# Altium PCB printer_tag_device1.PcbDoc
Units mil, origin at the board's own origin, x right, y up, seen from the top; angles counter-clockwise.
Board outline 6000 x 4000 mil, 2 copper layers (Top Layer, Bottom Layer); 258 components, 164 nets, 940 pads, 4 vias.
Unrouted connection lines stored in the file: 662.
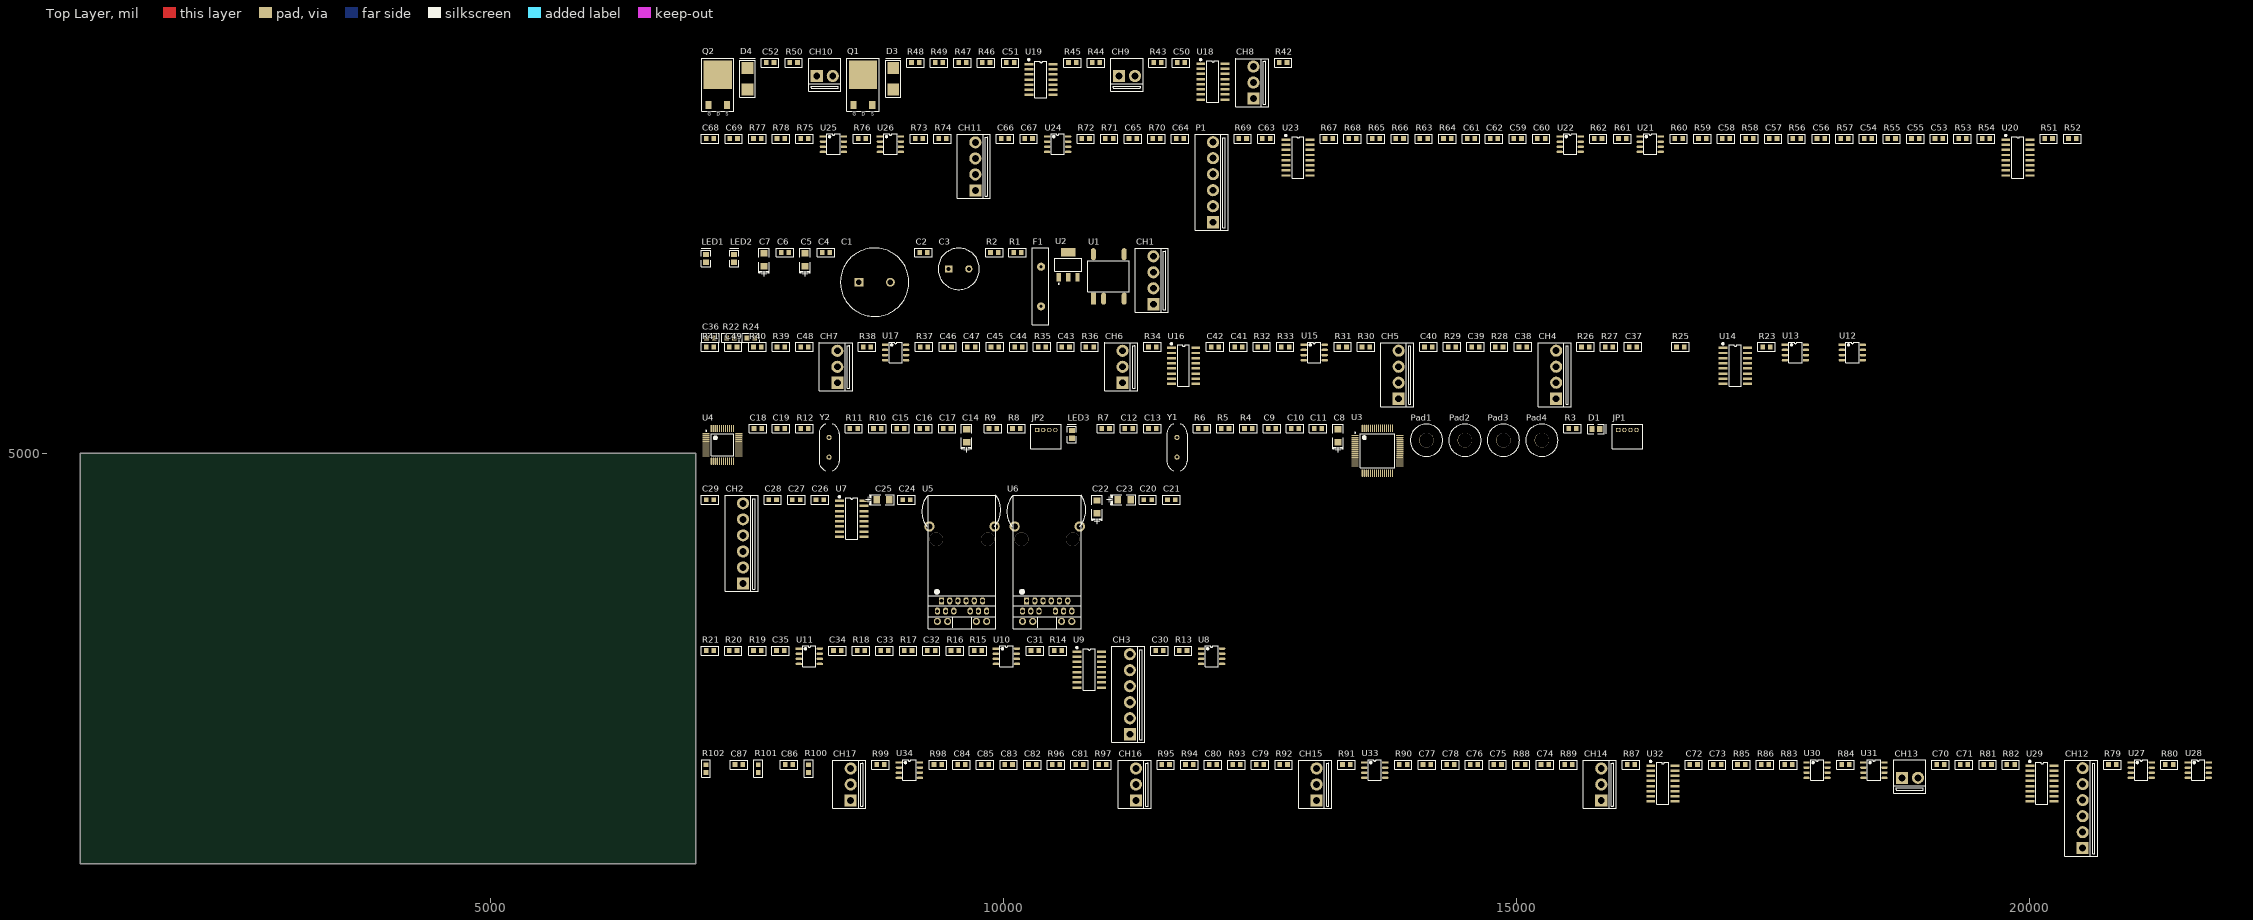
[diagram p0: Top Layer view]
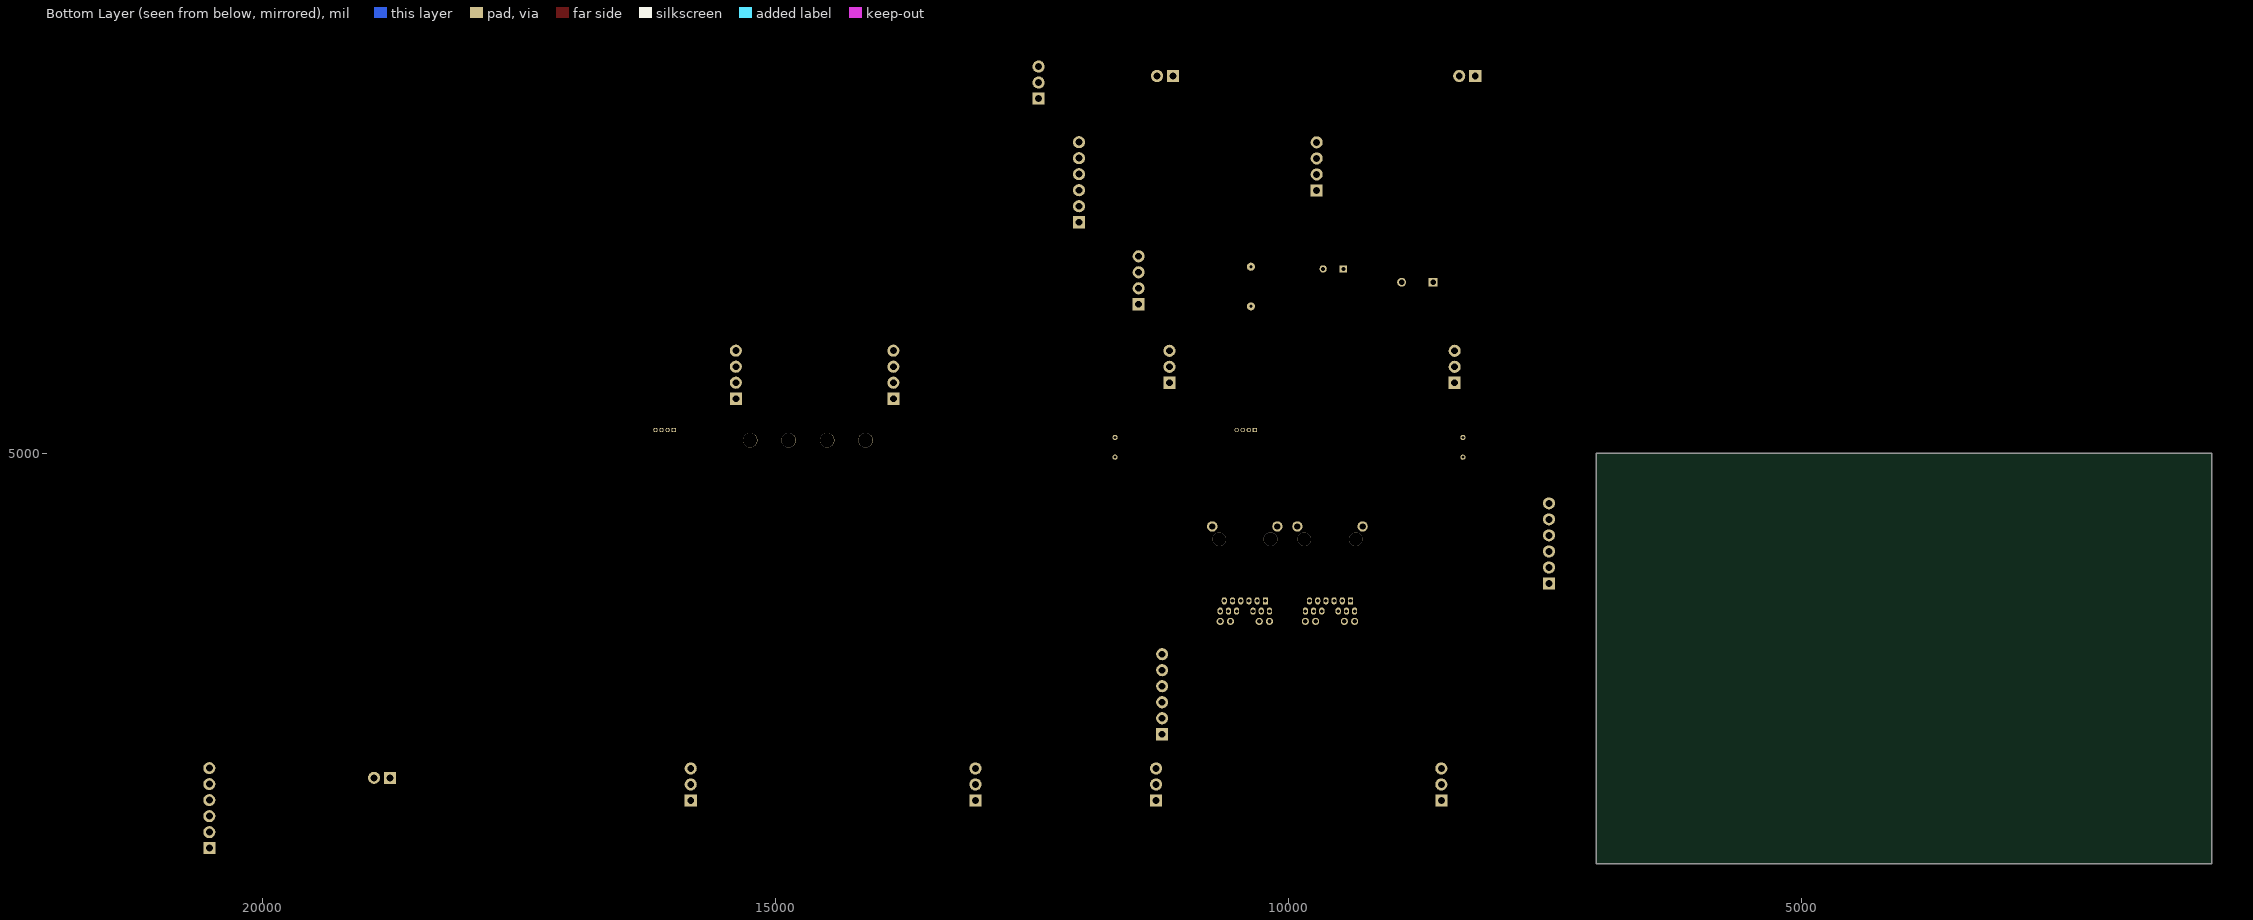
[diagram p1: Bottom Layer view, seen from below]

## Layer stack, top to bottom
Top Solder: solder mask 0.4, Solder Resist, Dk 3.5
Top Layer: signal copper 1.4
Dielectric 1: dielectric 12.6, FR-4, Dk 4.8
Bottom Layer: signal copper 1.4
Bottom Solder: solder mask 0.4, Solder Resist, Dk 3.5

## Board outline
1000,1000 7000,1000 7000,5000 1000,5000

## Design rules (kind name [scope] priority, off if disabled: settings)
Clearance [All] p1: gap=10
PolygonConnect [All] p1: connectstyle=Relief reliefconductorwidth=10 reliefentries=4 polygonreliefangle="90 Angle" airgapwidth=10
RoomDefinition roll_motorl_control [InComponentClass('roll_motorl_control')] p1: confinementstyle=ConfineIn formatcopy=TRUE lockcomponents=FALSE outline 7045,8270 12825,8270 12825,8960 7045,8960
RoomDefinition printer_control [InComponentClass('printer_control')] p2: confinementstyle=ConfineIn formatcopy=TRUE lockcomponents=FALSE outline 7045,7160 20515,7160 20515,8220 7045,8220
RoomDefinition power [InComponentClass('power')] p3: confinementstyle=ConfineIn formatcopy=TRUE lockcomponents=FALSE outline 7045,6240 11620,6240 11620,7110 7045,7110
RoomDefinition light_key_control [InComponentClass('light_key_control')] p4: confinementstyle=ConfineIn formatcopy=TRUE lockcomponents=FALSE outline 7045,5440 18420,5440 18420,6190 7045,6190
RoomDefinition cpu [InComponentClass('cpu')] p5: confinementstyle=ConfineIn formatcopy=TRUE lockcomponents=FALSE outline 7045,4750 16240,4750 16240,5395 7045,5395
RoomDefinition communition [InComponentClass('communition')] p6: confinementstyle=ConfineIn formatcopy=TRUE lockcomponents=FALSE outline 7045,3280 11730,3280 11730,4700 7045,4700
RoomDefinition belt_motor_control [InComponentClass('belt_motor_control')] p7: confinementstyle=ConfineIn formatcopy=TRUE lockcomponents=FALSE outline 7045,2170 12175,2170 12175,3230 7045,3230
RoomDefinition air_cylinder_control [InComponentClass('air_cylinder_control')] p8: confinementstyle=ConfineIn formatcopy=TRUE lockcomponents=FALSE outline 7045,1060 21790,1060 21790,2120 7045,2120
RoutingVias [All] p1: holewidth=28 width=50 viastyle="Through Hole" minholewidth=28 minwidth=50 maxholewidth=28 maxwidth=50
SolderMaskExpansion [All] p1: expansion=4
Width [All] p1: maxlimit=10 minlimit=10 preferedwidth=10
29 further rules are at their usual default settings.

## Classes and differential pairs
component class air_cylinder_control: C70 C71 C72 C73 C74 C75 C76 C77 C78 C79 C80 C81 C82 C83 C84 C85 C86 C87 CH12 CH13 CH14 CH15 CH16 CH17 R79 R80 R81 R82 R83 R84 R85 R86 R87 R88 R89 R90 R91 R92 R93 R94 R95 R96 R97 R98 R99 R100 R101 R102 U27 U28 U29 U30 U31 U32 U33 U34
component class belt_motor_control: C30 C31 C32 C33 C34 C35 CH3 R13 R14 R15 R16 R17 R18 R19 R20 R21 U8 U9 U10 U11
component class communition: C20 C21 C22 C23 C24 C25 C26 C27 C28 C29 CH2 U5 U6 U7
component class cpu: C8 C9 C10 C11 C12 C13 C14 C15 C16 C17 C18 C19 D1 JP1 JP2 LED3 Pad1 Pad2 Pad3 Pad4 R3 R4 R5 R6 R7 R8 R9 R10 R11 R12 U3 U4 Y1 Y2
component class light_key_control: C37 C38 C39 C40 C41 C42 C43 C44 C45 C46 C47 C48 C49 CH4 CH5 CH6 CH7 R23 R25 R26 R27 R28 R29 R30 R31 R32 R33 R34 R35 R36 R37 R38 R39 R40 R41 U12 U13 U14 U15 U16 U17
component class power: C1 C2 C3 C4 C5 C6 C7 CH1 F1 LED1 LED2 R1 R2 U1 U2
component class printer_control: C53 C54 C55 C56 C57 C58 C59 C60 C61 C62 C63 C64 C65 C66 C67 C68 C69 CH11 P1 R51 R52 R53 R54 R55 R56 R57 R58 R59 R60 R61 R62 R63 R64 R65 R66 R67 R68 R69 R70 R71 R72 R73 R74 R75 R76 R77 R78 U20 U21 U22 U23 U24 U25 U26
component class roll_motorl_control: C50 C51 C52 CH8 CH9 CH10 D3 D4 Q1 Q2 R42 R43 R44 R45 R46 R47 R48 R49 R50 U18 U19

## Components (designator, comment, footprint, x,y, rotation, side; value= is the part's Value field where it differs from the comment)
C1 "C_2200uF" C7.8*17 8590,6665 r0 top
C2 "Cap" 0805 9220,6955 r0 top
C3 "C_2200uF" C5*10 9465,6795 r0 top
C4 "Cap" 0805 8270,6955 r0 top
C5 "Cap Pol3" "CAP A-3216" 8065,6885 r90 top
C6 "Cap" 0805 7870,6955 r0 top
C7 "Cap Pol3" "CAP A-3216" 7665,6885 r90 top
C8 "Cap Pol3" "CAP A-3216" 13260,5170 r90 top
C9 "Cap" 0805 12615,5240 r0 top
C10 "Cap" 0805 12840,5240 r0 top
C11 "Cap" 0805 13065,5240 r0 top
C12 "Cap" 0805 11220,5240 r0 top
C13 "Cap" 0805 11450,5240 r0 top
C14 "Cap Pol3" "CAP A-3216" 9640,5170 r90 top
C15 "Cap" 0805 8995,5240 r0 top
C16 "Cap" 0805 9220,5240 r0 top
C17 "Cap" 0805 9450,5240 r0 top
C18 "Cap" 0805 7605,5240 r0 top
C19 "Cap" 0805 7830,5240 r0 top
C20 "Cap" 0805 11405,4545 r0 top
C21 "Cap" 0805 11635,4545 r0 top
C22 "Cap Pol3" "CAP A-3216" 10910,4475 r90 top
C23 "Cap Pol3" "CAP A-3216" 11175,4545 r0 top
C24 "Cap" 0805 9055,4545 r0 top
C25 "Cap Pol3" "CAP A-3216" 8825,4545 r0 top
C26 "Cap" 0805 8210,4545 r0 top
C27 "Cap" 0805 7980,4545 r0 top
C28 "Cap" 0805 7750,4545 r0 top
C29 "Cap" 0805 7140,4545 r0 top
C30 "Cap" 0805 11520,3075 r0 top
C31 "Cap" 0805 10305,3075 r0 top
C32 "Cap" 0805 9295,3075 r0 top
C33 "Cap" 0805 8840,3075 r0 top
C34 "Cap" 0805 8380,3075 r0 top
C35 "Cap" 0805 7825,3075 r0 top
C36 "Cap" 0805 7142.94,6123.06 r0 top
C37 "Cap" 0805 16135,6035 r0 top
C38 "Cap" 0805 15060,6035 r0 top
C39 "Cap" 0805 14600,6035 r0 top
C40 "Cap" 0805 14140,6035 r0 top
C41 "Cap" 0805 12290,6035 r0 top
C42 "Cap" 0805 12060,6035 r0 top
C43 "Cap" 0805 10605,6035 r0 top
C44 "Cap" 0805 10145,6035 r0 top
C45 "Cap" 0805 9915,6035 r0 top
C46 "Cap" 0805 9455,6035 r0 top
C47 "Cap" 0805 9685,6035 r0 top
C48 "Cap" 0805 8060,6035 r0 top
C49 "Cap" 0805 7365,6035 r0 top
C50 "Cap" 0805 11730,8805 r0 top
C51 "Cap" 0805 10065,8805 r0 top
C52 "Cap" 0805 7725,8805 r0 top
C53 "Cap" 0805 19115,8065 r0 top
C54 "Cap" 0805 18425,8065 r0 top
C55 "Cap" 0805 18885,8065 r0 top
C56 "Cap" 0805 17965,8065 r0 top
C57 "Cap" 0805 17500,8065 r0 top
C58 "Cap" 0805 17040,8065 r0 top
C59 "Cap" 0805 15010,8065 r0 top
C60 "Cap" 0805 15240,8065 r0 top
C61 "Cap" 0805 14555,8065 r0 top
C62 "Cap" 0805 14780,8065 r0 top
C63 "Cap" 0805 12560,8065 r0 top
C64 "Cap" 0805 11720,8065 r0 top
C65 "Cap" 0805 11260,8065 r0 top
C66 "Cap" 0805 10015,8065 r0 top
C67 "Cap" 0805 10245,8065 r0 top
C68 "Cap" 0805 7140,8065 r0 top
C69 "Cap" 0805 7370,8065 r0 top
C70 "Cap" 0805 19130,1965 r0 top
C71 "Cap" 0805 19360,1965 r0 top
C72 "Cap" 0805 16725,1965 r0 top
C73 "Cap" 0805 16955,1965 r0 top
C74 "Cap" 0805 15275,1965 r0 top
C75 "Cap" 0805 14815,1965 r0 top
C76 "Cap" 0805 14585,1965 r0 top
C77 "Cap" 0805 14125,1965 r0 top
C78 "Cap" 0805 14355,1965 r0 top
C79 "Cap" 0805 12500,1965 r0 top
C80 "Cap" 0805 12040,1965 r0 top
C81 "Cap" 0805 10740,1965 r0 top
C82 "Cap" 0805 10280,1965 r0 top
C83 "Cap" 0805 10050,1965 r0 top
C84 "Cap" 0805 9590,1965 r0 top
C85 "Cap" 0805 9820,1965 r0 top
C86 "Cap" 0805 7910,1965 r0 top
C87 "Cap" 0805 7420,1965 r0 top
CH1 "HEADER1X4" CH3.96-4PIN 11460,6450 r90 top
CH2 "HEADER1X6" CH3.96-6PIN 7460,3730 r90 top
CH3 "HEADER1X6" CH3.96-6PIN 11230,2260 r90 top
CH4 "HEADER1X4" CH3.96-4PIN 15385,5530 r90 top
CH5 "HEADER1X4" CH3.96-4PIN 13850,5530 r90 top
CH6 "HEADER1X3" CH3.96-3PIN 11160,5685 r90 top
CH7 "HEADER1X3" CH3.96-3PIN 8380,5685 r90 top
CH8 "HEADER1X3" CH3.96-3PIN 12435,8455 r90 top
CH9 "HEADER1X2" CH3.96-2PIN 11125,8675 r0 top
CH10 "HEADER1X2" CH3.96-2PIN 8180,8675 r0 top
CH11 "HEADER1X4" CH3.96-4PIN 9725,7560 r90 top
CH12 "HEADER1X6" CH3.96-6PIN 20515,1150 r90 top
CH13 "HEADER1X2" CH3.96-2PIN 18755,1835 r0 top
CH14 "HEADER1X3" CH3.96-3PIN 15825,1615 r90 top
CH15 "HEADER1X3" CH3.96-3PIN 13050,1615 r90 top
CH16 "HEADER1X3" CH3.96-3PIN 11290,1615 r90 top
CH17 "HEADER1X3" CH3.96-3PIN 8510,1615 r90 top
D1 "Ready" LED-0805 15735,5235 r0 top
D3 "1N5822(SS34)" SMA 8925,8545 r90 top (schematic designator D2)
D4 "1N5822(SS34)" SMA 7505,8545 r90 top (schematic designator D3)
F1 "X30_UF500" X30UF600 10365,6430 r90 top
JP1 "4 HEADER" CON4_1.5 16080,5225 r0 top
JP2 "4 HEADER" CON4_1.5 10415,5225 r0 top
LED1 "" LED-0805 7100,6860 r90 top
LED2 "" LED-0805 7375,6860 r90 top
LED3 "" LED-0805 10665,5145 r90 top
P1 "HEADER1X6" CH3.96-6PIN 12040,7250 r90 top
Pad1 "Pad" pad35 14120,5125 r0 top
Pad2 "Pad" pad35 14495,5125 r0 top
Pad3 "Pad" pad35 14870,5125 r0 top
Pad4 "Pad" pad35 15245,5125 r0 top
Q1 "FR5305 (PMOS-2)" TO-252 8630,8540 r0 top
Q2 "FR4105 (NMOS-2)" TO-252 7215,8540 r0 top
R1 "Res2" 0805 10135,6955 r0 top
R2 "Res2" 0805 9910,6955 r0 top
R3 "Res2" 0805 15545,5240 r0 top
R4 "Res2" 0805 12385,5240 r0 top
R5 "Res2" 0805 12160,5240 r0 top
R6 "Res2" 0805 11935,5240 r0 top
R7 "Res2" 0805 10995,5240 r0 top
R8 "Res2" 0805 10125,5240 r0 top
R9 "Res2" 0805 9895,5240 r0 top
R10 "Res2" 0805 8770,5240 r0 top
R11 "Res2" 0805 8540,5240 r0 top
R12 "Res2" 0805 8060,5240 r0 top
R13 "Res2" 0805 11750,3075 r0 top
R14 "Res2" 0805 10530,3075 r0 top
R15 "Res2" 0805 9750,3075 r0 top
R16 "Res2" 0805 9525,3075 r0 top
R17 "Res2" 0805 9070,3075 r0 top
R18 "Res2" 0805 8610,3075 r0 top
R19 "Res2" 0805 7600,3075 r0 top
R20 "Res2" 0805 7365,3075 r0 top
R21 "Res2" 0805 7140,3075 r0 top
R22 "Res2" 0805 7339.81,6123.06 r0 top
R23 "Res2" 0805 17435,6035 r0 top
R24 "Res2" 0805 7536.69,6123.06 r0 top
R25 "Res2" 0805 16595,6035 r0 top
R26 "Res2" 0805 15670,6035 r0 top
R27 "Res2" 0805 15900,6035 r0 top
R28 "Res2" 0805 14830,6035 r0 top
R29 "Res2" 0805 14370,6035 r0 top
R30 "Res2" 0805 13530,6035 r0 top
R31 "Res2" 0805 13305,6035 r0 top
R32 "Res2" 0805 12515,6035 r0 top
R33 "Res2" 0805 12745,6035 r0 top
R34 "Res2" 0805 11450,6035 r0 top
R35 "Res2" 0805 10375,6035 r0 top
R36 "Res2" 0805 10840,6035 r0 top
R37 "Res2" 0805 9225,6035 r0 top
R38 "Res2" 0805 8670,6035 r0 top
R39 "Res2" 0805 7830,6035 r0 top
R40 "Res2" 0805 7600,6035 r0 top
R41 "Res2" 0805 7140,6035 r0 top
R42 "Res2" 0805 12725,8805 r0 top
R43 "Res2" 0805 11500,8805 r0 top
R44 "Res2" 0805 10900,8805 r0 top
R45 "Res2" 0805 10670,8805 r0 top
R46 "Res2" 0805 9830,8805 r0 top
R47 "Res2" 0805 9600,8805 r0 top
R48 "Res2" 0805 9140,8805 r0 top
R49 "Res2" 0805 9370,8805 r0 top
R50 "Res2" 0805 7955,8805 r0 top
R51 "Res2" 0805 20185,8065 r0 top
R52 "Res2" 0805 20415,8065 r0 top
R53 "Res2" 0805 19345,8065 r0 top
R54 "Res2" 0805 19575,8065 r0 top
R55 "Res2" 0805 18655,8065 r0 top
R56 "Res2" 0805 17730,8065 r0 top
R57 "Res2" 0805 18195,8065 r0 top
R58 "Res2" 0805 17270,8065 r0 top
R59 "Res2" 0805 16810,8065 r0 top
R60 "Res2" 0805 16580,8065 r0 top
R61 "Res2" 0805 16030,8065 r0 top
R62 "Res2" 0805 15795,8065 r0 top
R63 "Res2" 0805 14095,8065 r0 top
R64 "Res2" 0805 14325,8065 r0 top
R65 "Res2" 0805 13630,8065 r0 top
R66 "Res2" 0805 13860,8065 r0 top
R67 "Res2" 0805 13170,8065 r0 top
R68 "Res2" 0805 13400,8065 r0 top
R69 "Res2" 0805 12330,8065 r0 top
R70 "Res2" 0805 11490,8065 r0 top
R71 "Res2" 0805 11030,8065 r0 top
R72 "Res2" 0805 10800,8065 r0 top
R73 "Res2" 0805 9175,8065 r0 top
R74 "Res2" 0805 9405,8065 r0 top
R75 "Res2" 0805 8060,8065 r0 top
R76 "Res2" 0805 8620,8065 r0 top
R77 "Res2" 0805 7600,8065 r0 top
R78 "Res2" 0805 7830,8065 r0 top
R79 "Res2" 0805 20805,1965 r0 top
R80 "Res2" 0805 21360,1965 r0 top
R81 "Res2" 0805 19590,1965 r0 top
R82 "Res2" 0805 19815,1965 r0 top
R83 "Res2" 0805 17650,1965 r0 top
R84 "Res2" 0805 18205,1965 r0 top
R85 "Res2" 0805 17190,1965 r0 top
R86 "Res2" 0805 17420,1965 r0 top
R87 "Res2" 0805 16115,1965 r0 top
R88 "Res2" 0805 15045,1965 r0 top
R89 "Res2" 0805 15505,1965 r0 top
R90 "Res2" 0805 13895,1965 r0 top
R91 "Res2" 0805 13340,1965 r0 top
R92 "Res2" 0805 12730,1965 r0 top
R93 "Res2" 0805 12270,1965 r0 top
R94 "Res2" 0805 11810,1965 r0 top
R95 "Res2" 0805 11580,1965 r0 top
R96 "Res2" 0805 10510,1965 r0 top
R97 "Res2" 0805 10965,1965 r0 top
R98 "Res2" 0805 9360,1965 r0 top
R99 "Res2" 0805 8800,1965 r0 top
R100 "Res2" 0805 8100,1925 r90 top
R101 "Res2" 0805 7610,1925 r90 top
R102 "Res2" 0805 7100,1925 r90 top
U1 "B2405XT-2WR2" B2405XT-2WR2 10875,6505 r90 top
U2 "AMS1117-3.3" SOT223 10630,6835 r0 top
U3 "STM32F103RBT6" LQFP64 13425,5170 r0 top
U4 "STM32F103C8T6" LQFP48 7260,5080 r0 top
U5 "USR-K3" USR-K3 9395,3560 r90 top
U6 "USR-K3" USR-K3 10225,3560 r90 top
U7 "TLP280-4" SO16 8520,4360 r0 top
U8 "CEM4435A" SOP8-OP27 11925,3095 r0 top
U9 "TLP280-4" SO16 10835,2890 r0 top
U10 "CEM4435A" SOP8-OP27 9925,3095 r0 top
U11 "LM293" SOP8-OP27 8005,3095 r0 top
U12 "CEM4435A" SOP8-OP27 18170,6055 r0 top
U13 "CEM4435A" SOP8-OP27 17615,6055 r0 top
U14 "TLP280-4" SO16 17130,5850 r0 top
U15 "LM293" SOP8-OP27 12925,6055 r0 top
U16 "TLP280-4" SO16 11755,5850 r0 top
U17 "LM293" SOP8-OP27 8845,6055 r0 top
U18 "TLP280-4" SO16 12040,8620 r0 top
U19 "74HC10" SO14 10365,8640 r0 top
U20 "TLP280-4" SO16 19885,7880 r0 top
U21 "LM293" SOP8-OP27 16200,8085 r0 top
U22 "LM293" SOP8-OP27 15420,8085 r0 top
U23 "TLP280-4" SO16 12870,7880 r0 top
U24 "LM293" SOP8-OP27 10425,8085 r0 top
U25 "CEM4435A" SOP8-OP27 8240,8085 r0 top
U26 "CEM4435A" SOP8-OP27 8795,8085 r0 top
U27 "CEM4435A" SOP8-OP27 20985,1985 r0 top
U28 "CEM4435A" SOP8-OP27 21540,1985 r0 top
U29 "TLP280-4" SO16 20120,1780 r0 top
U30 "CEM4435A" SOP8-OP27 17825,1985 r0 top
U31 "CEM4435A" SOP8-OP27 18380,1985 r0 top
U32 "TLP280-4" SO16 16425,1780 r0 top
U33 "LM293" SOP8-OP27 13515,1985 r0 top
U34 "LM293" SOP8-OP27 8980,1985 r0 top
Y1 "8MHz" XTAL_US 11690,4960 r90 top
Y2 "8MHz" XTAL_US 8300,4960 r90 top

## Footprints (in the part's own frame and the unit in brackets; to place one, negate y for a bottom-side part, rotate by r counter-clockwise, add the part's x,y. Pads: shape width x height; smd on the part's side, far side on the other; paste and mask are expansions set on the pad)
0805 [mm] "1.14mm,1.2mm,3.05mm"
  rect 1.14x1.2 smd: 1(-0.95,0) 2(0.95,0)
  silkscreen extent -2.13,-1.12 2.16,1.09
B2405XT-2WR2 [mm]
  rect 3x1.2 smd: 1(0,0)
  oval 3x1.2 smd: 2(0,-2.54) 4(0,-7.62) 5(11,-7.62) 8(11,0)
  silkscreen extent 1.73,-8.89 9.32,1.37
C5*10 [mm]
  rect 1.8x1.8 hole 1: 1(0,0)
  round 1.8 hole 1: 2(5,0)
  silkscreen extent -2.62,-5.11 7.62,5.11
C7.8*17 [mm]
  rect 2.2x2.2 hole 1.4: 1(0,0)
  round 2.2 hole 1.4: 2(7.8,0)
  silkscreen extent -4.57,-8.47 12.37,8.47
"CAP A-3216" [mm]
  rect 1.6x1.8 smd: 1(-1.6,0) 2(1.6,0)
  silkscreen extent -3.25,-1.27 2.85,1.27
CH3.96-2PIN [mm]
  rect 3x3 hole 1.7: 1(0,0)
  round 3 hole 1.7: 2(3.96,0)
  silkscreen extent -1.98,-3.76 5.94,4.42
CH3.96-3PIN [mm]
  rect 3x3 hole 1.7: 1(0,0)
  round 3 hole 1.7: 2(3.96,0) 3(7.92,0)
  silkscreen extent -1.98,-3.76 9.98,4.42
CH3.96-4PIN [mm]
  rect 3x3 hole 1.7: 1(0,0)
  round 3 hole 1.7: 2(3.96,0) 3(7.92,0) 4(11.887,0)
  silkscreen extent -1.98,-3.73 13.89,4.45
CH3.96-6PIN [mm]
  rect 3x3 hole 1.7: 1(0,-0.025)
  round 3 hole 1.7: 2(3.96,-0.025) 3(7.92,-0.025) 4(11.887,-0.025) 5(15.847,-0.025) 6(19.807,-0.025)
  silkscreen extent -1.98,-3.76 21.79,4.42
CON4_1.5 [mm]
  rect 1.1x1.1 hole 0.8: 1(-2.25,0)
  round 1.1 hole 0.8: 2(-0.75,0) 3(0.75,0) 4(2.25,0)
  silkscreen extent -3.75,-4.6 3.75,1.4
LED-0805 [mm]
  rect 1.3x1.5 smd: 1(0,0) 2(1.9,0)
  silkscreen extent -1.08,-1.14 3.49,1.14
LQFP48 [mm]
  oval 1.8x0.3 smd: 1(-4.05,2.75) 2(-4.05,2.25) 3(-4.05,1.75) 4(-4.05,1.25) 5(-4.05,0.75) 6(-4.05,0.25) 7(-4.05,-0.25) 8(-4.05,-0.75) 9(-4.05,-1.25) 10(-4.05,-1.75) 11(-4.05,-2.25) 12(-4.05,-2.75) 25(4.05,-2.75) 26(4.05,-2.25) 27(4.05,-1.75) 28(4.05,-1.25) 29(4.05,-0.75) 30(4.05,-0.25) 31(4.05,0.25) 32(4.05,0.75) 33(4.05,1.25) 34(4.05,1.75) 35(4.05,2.25) 36(4.05,2.75)
  oval 0.3x1.8 smd: 13(-2.75,-4.05) 14(-2.25,-4.05) 15(-1.75,-4.05) 16(-1.25,-4.05) 17(-0.75,-4.05) 18(-0.25,-4.05) 19(0.25,-4.05) 20(0.75,-4.05) 21(1.25,-4.05) 22(1.75,-4.05) 23(2.25,-4.05) 24(2.75,-4.05) 37(2.75,4.05) 38(2.25,4.05) 39(1.75,4.05) 40(1.25,4.05) 41(0.75,4.05) 42(0.25,4.05) 43(-0.25,4.05) 44(-0.75,4.05) 45(-1.25,4.05) 46(-1.75,4.05) 47(-2.25,4.05) 48(-2.75,4.05)
  silkscreen extent -4.17,-2.75 2.75,3.57, body extent -3.5,-3.5 3.5,3.5, height 1.6
LQFP64 [mm] "Thin QFP, 64-Leads, Body 10x10mm, Pitch 0.5mm, IPC Medium Density"
  oval 1.8x0.3 smd: 1(0,0) 2(0,-0.5) 3(0,-1) 4(0,-1.5) 5(0,-2) 6(0,-2.5) 7(0,-3) 8(0,-3.5) 9(0,-4) 10(0,-4.5) 11(0,-5) 12(0,-5.5) 13(0,-6) 14(0,-6.5) 15(0,-7) 16(0,-7.5) 33(11.1,-7.5) 34(11.1,-7) 35(11.1,-6.5) 36(11.1,-6) 37(11.1,-5.5) 38(11.1,-5) 39(11.1,-4.5) 40(11.1,-4) 41(11.1,-3.5) 42(11.1,-3) 43(11.1,-2.5) 44(11.1,-2) 45(11.1,-1.5) 46(11.1,-1) 47(11.1,-0.5) 48(11.1,0)
  oval 0.3x1.8 smd: 17(1.8,-9.3) 18(2.3,-9.3) 19(2.8,-9.3) 20(3.3,-9.3) 21(3.8,-9.3) 22(4.3,-9.3) 23(4.8,-9.3) 24(5.3,-9.3) 25(5.8,-9.3) 26(6.3,-9.3) 27(6.8,-9.3) 28(7.3,-9.3) 29(7.8,-9.3) 30(8.3,-9.3) 31(8.8,-9.3) 32(9.3,-9.3) 49(9.3,1.8) 50(8.8,1.8) 51(8.3,1.8) 52(7.8,1.8) 53(7.3,1.8) 54(6.8,1.8) 55(6.3,1.8) 56(5.8,1.8) 57(5.3,1.8) 58(4.8,1.8) 59(4.3,1.8) 60(3.8,1.8) 61(3.3,1.8) 62(2.8,1.8) 63(2.3,1.8) 64(1.8,1.8)
  silkscreen extent -0.12,-8 9.8,0.82, body extent 0.55,-8.75 10.55,1.25, height 1.6
pad35 [mm]
  round 3.6 hole 3.5: 1(0.025,0)
  silkscreen extent -3.97,-4 4.03,4
SMA [mm]
  rect 3x2.9 smd: 1(0,0) 2(5.3,0)
  silkscreen extent -1.92,-1.91 7.73,1.91
SO14 [mm] "Wide = 6mm"
  rect 2.2x0.6 smd: 1(-3,3.81) 2(-3,2.54) 3(-3,1.27) 4(-3,0) 5(-3,-1.27) 6(-3,-2.54) 7(-3,-3.81) 8(3,-3.81) 9(3,-2.54) 10(3,-1.27) 11(3,0) 12(3,1.27) 13(3,2.54) 14(3,3.81)
  silkscreen extent -3.23,-4.44 1.45,5.13
SO16 [mm] "Wide = 6mm"
  rect 2.2x0.6 smd: 1(-3,4.445) 2(-3,3.175) 3(-3,1.905) 4(-3,0.635) 5(-3,-0.635) 6(-3,-1.905) 7(-3,-3.175) 8(-3,-4.445) 9(3,-4.445) 10(3,-3.175) 11(3,-1.905) 12(3,-0.635) 13(3,0.635) 14(3,1.905) 15(3,3.175) 16(3,4.445)
  silkscreen extent -3.23,-5.08 1.45,5.64
SOP8-OP27 [mm]
  rect 1.6x0.6 smd: 1(0,0)
  oval 1.6x0.6 smd: 2(0,-1.27) 3(0,-2.54) 4(0,-3.81) 5(5.2,-3.81) 6(5.2,-2.54) 7(5.2,-1.27) 8(5.2,0)
  silkscreen extent 0.99,-4.44 4.24,0.64
SOT223 [mm] "SOT-223/SC-73; 4 Leads; Body 6.7 x 7.3 mm, inc. leads (LxW max)"
  rect 1.1x2.15 smd: 1(-2.3,-3.1) 2(0,-3.1) 3(2.3,-3.1)
  rect 3.5x2.15 smd: 4(0,3.1)
  silkscreen extent -3.35,-4.85 3.35,1.63
TO-252 [mm]
  rect 1.5x2 smd: 1(-2.3,-3.75) 3(2.3,-3.75)
  rect 7x7 smd: 2(0,3.75)
  silkscreen extent -4,-5.32 4,7.87
USR-K3 [mil]
  rect 70x50 hole 35: 1(0,0)
  oval 70x50 hole 35: 2(0,-80) 3(0,-160) 4(0,-240) 5(0,-320) 6(0,-400) 7(-100,40) 8(-100,-40) 9(-100,-120) 10(-100,-280) 11(-100,-360) 12(-100,-440)
  round 70 hole 43: 13(-200,40) 14(-200,-60) 15(-200,-340) 16(-200,-440)
  round 101.18 hole 61.81: 17(725,-517.5) 17(725,117.5)
  silkscreen extent -270,-577 1030,192
X30UF600 [mm]
  round 2 hole 0.8: 1(0,0) 2(9.804,0)
  silkscreen extent -4.57,-1.93 14.45,2.21
XTAL_US [mil]
  round 50 hole 28: 1(0,0) 2(192.13,0)
  silkscreen extent -131,-98 323,98

## Part data
C2 C4 C6 C9 C10 C11 C12 C13 C15 C16 C17 C18 C19 C20 C21 C24 C26 C27 C28 C29 C30 C31 C32 C33 C34 C35 C36 C37 C38 C39 C40 C41 C42 C43 C44 C45 C46 C47 C48 C49 C50 C51 C52 C53 C54 C55 C56 C57 C58 C59 C60 C61 C62 C63 C64 C65 C66 C67 C68 C69 C70 C71 C72 C73 C74 C75 C76 C77 C78 C79 C80 C81 C82 C83 C84 C85 C86 C87: "Capacitor"
C5 C7 C8 C14 C22 C23 C25: "Polarized Capacitor (Surface Mount)"
CH2: library part HEADER1X4
D1 LED1 LED2 LED3: library part LED2, "Typical RED, GREEN, YELLOW, AMBER GaAs LED"
D3 D4: library part "Diode 1N4148", "High Conductance Fast Diode"
F1: library part "Fuse 1", "Fuse"
JP1 JP2: "4 Pin Header"
Q1: library part PMOS-2, "P-Channel Power MOSFET"
Q2: library part NMOS-2, "N-Channel Power MOSFET"
R1 R2 R3 R4 R5 R6 R7 R8 R9 R10 R11 R12 R13 R14 R15 R16 R17 R18 R19 R20 R21 R22 R23 R24 R25 R26 R27 R28 R29 R30 R31 R32 R33 R34 R35 R36 R37 R38 R39 R40 R41 R42 R43 R44 R45 R46 R47 R48 R49 R50 R51 R52 R53 R54 R55 R56 R57 R58 R59 R60 R61 R62 R63 R64 R65 R66 R67 R68 R69 R70 R71 R72 R73 R74 R75 R76 R77 R78 R79 R80 R81 R82 R83 R84 R85 R86 R87 R88 R89 R90 R91 R92 R93 R94 R95 R96 R97 R98 R99 R100 R101 R102: "Resistor"
U2: library part AMS1117-5
U3: library part STM32F103RDT6
U7: library part MAX3232ESE, "3.0V TO 5.5V, Low-Power, up to 1Mbps, True RS-232 Transceiver Using Four 0.1礔 External Capacitor"
U9 U14 U16 U18 U20 U23 U29 U32: library part TLP521-4
U19: "three input nand gain"
Y1 Y2: library part XTAL, "Crystal Oscillator"

## Via types
v1: diameter 133.86, hole 133.86, Top Layer to Bottom Layer, 4 vias

## Nets (pads, with @x,y where several pads share a name; then routed paths per layer and width w, separated by ;. In a path a pad name is that pad's centre, name@x,y a point inside that pad or via, vN(x,y) a via of type N, cw(c..) or ccw(c..) an arc to the next point about the centre after c; other vN are vias at no path point)
24V0: C1.2 C4.1 C30.2 C31.2 C32.1 C36.2 C37.2 C47.1 C49.1 C50.1 C52.1 C68.1 C69.1 C70.1 C71.1 C72.1 C73.1 C78.1 C80.1 C85.1 C87.1 CH1.2 CH1.4 CH3.2 CH3.6 CH4.2 CH4.4 CH5.2 CH5.4 CH6.2 CH7.2 CH8.2 CH9.2 CH10.2 CH11.3 CH11.4 CH12.5 CH12.6 CH13.2 CH14.2 CH15.2 CH16.2 CH17.2 D4.1 LED2.2 Q2.3 U1.1 U9.6 U9.13 U9.15 U14.13 U14.15 U16.2 U16.4 U18.2 U18.9 U18.11 U23.9 U23.11 U29.9 U29.11 U29.13 U29.15 U32.2 U32.4
+3.3V: C6.2 C7.1 C8.1 C9.2 C10.2 C11.2 C14.1 C15.2 C16.2 C17.2 C20.2 C21.2 C22.1 C23.1 C24.2 C25.1 CH2.1 D1.1 JP1.1 JP2.1 R2.2 R6.1 R8.2 R12.1 U2.2 U2.4 U3.13 U3.19 U3.32 U3.48 U3.64 U4.9 U4.24 U4.36 U4.48 U5.11 U5.14 U5.15 U6.11 U6.14 U6.15 U7.16
+5V: C2.2 C3.1 C5.1 C35.2 C40.2 C45.2 C51.2 C57.2 C58.2 C65.2 C76.2 C83.2 R18.1 R20.1 R27.1 R28.1 R30.1 R31.1 R33.1 R35.1 R37.1 R38.1 R46.1 R48.1 R52.1 R54.1 R55.1 R56.1 R59.1 R60.1 R61.1 R62.1 R64.1 R66.1 R68.1 R69.1 R71.1 R72.1 R74.1 R88.2 R90.2 R91.2 R96.2 R98.2 R99.2 U1.5 U2.3 U9.12 U11.8 U15.8 U16.14 U16.16 U17.8 U18.14 U18.16 U19.14 U21.8 U22.8 U24.8 U32.10 U32.12 U32.14 U32.16 U33.8 U34.8
+24V: C1.1 C4.2 C30.1 CH3.1 CH6.1 CH7.1 CH8.1 CH14.1 CH15.1 CH16.1 CH17.1 D3.2 F1.2 Q1.3 R1.2 R13.2 R15.1 R22.2 R23.2 R26.1 R32.1 R44.1 R49.1 R50.1 R51.1 R53.1 R63.1 R65.1 R67.1 R73.1 R75.1 R76.1 R79.1 R80.1 R83.1 R84.1 U1.2 U8.1 U8.2 U8.3 U10.1 U10.2 U10.3 U12.1 U12.2 U12.3 U13.1 U13.2 U13.3 U25.1 U25.2 U25.3 U26.1 U26.2 U26.3 U27.1 U27.2 U27.3 U28.1 U28.2 U28.3 U30.1 U30.2 U30.3 U31.1 U31.2 U31.3
+24V_IN: CH1.1 CH1.3 F1.1
AIR_BLOW_IN: R85.1 U3.52
AIR_BLOW_OUT: C72.2 CH12.3 U30.5 U30.6 U30.7 U30.8
AIR_CYLINDER_IN: R82.1 U3.53
AIR_CYLINDER_OUT: C71.2 U28.5 U28.6 U28.7 U28.8
BAFFLE_IN: R81.1 U4.42
BAFFLE_INTER: C86.2 R102.2 U34.6
BAFFLE_INTER_IN: C87.2 CH17.3 R100.1
BAFFLE_INTER_OUT: C82.1 R98.1 U4.22 U34.7
BAFFLE_OUT: C70.2 CH12.2 U27.5 U27.6 U27.7 U27.8
BAFFLE_OUTER: C84.1 R97.2 U34.2
BAFFLE_OUTER_IN: C85.2 CH16.3 R95.1
BAFFLE_OUTER_OUT: C81.1 R96.1 U4.21 U34.1
CPU1_NET_RST: U3.41 U4.29
CPU1_USART1_RXD: U3.43 U5.9
CPU1_USART1_TXD: U3.42 U5.8
CPU2_NET_RST: 
CPU2_USART1_RXD: U4.31 U6.9
CPU2_USART1_TXD: U4.30 U6.8
CPU2_USART2_RXD: U4.13 U7.12
CPU2_USART2_TXD: U4.12 U7.11
CPU_CONTROL_ROLL: R46.2 R47.1 U3.23 U19.5
DIR11_IN: R16.2 U3.61
DIR11_OUT: C32.2 CH3.4 U10.5 U10.6 U10.7 U10.8
ER11: C34.1 R19.2 U9.11 U11.2
ERR11_IN: CH3.5 R17.1
ERR11_OUT: C33.1 R18.2 U3.11 U11.1
FIT_REACH: C79.2 R94.2 U32.13 U33.6
FIT_REACH_IN: C80.2 CH15.3 R92.1
FIT_REACH_OUT: C75.1 R90.1 U3.40 U33.7
FLUID_BAG: C46.1 R36.1 U16.15 U17.2
FLUID_BAG_IN: C47.2 CH6.3 R34.1
FLUID_BAG_OUT: C43.1 R35.2 U3.27 U17.1
GND: C2.1 C3.2 C5.2 C6.1 C7.2 C8.2 C9.1 C10.1 C11.1 C12.1 C13.1 C14.2 C15.1 C16.1 C17.1 C18.1 C19.1 C20.1 C21.1 C22.2 C23.2 C24.1 C25.2 C27.1 C29.1 C33.2 C34.2 C35.1 C38.1 C39.1 C40.1 C41.1 C42.1 C43.2 C44.2 C45.1 C46.2 C48.1 C51.1 C53.2 C54.2 C55.2 C56.2 C57.1 C58.1 C59.1 C60.1 C61.1 C62.1 C63.2 C64.2 C65.1 C66.1 C67.1 C74.2 C75.2 C76.1 C77.2 C79.1 C81.2 C82.2 C83.1 C84.2 C86.1 CH2.4 JP1.4 JP2.4 LED1.2 R4.2 R7.1 R9.2 R11.1 R19.1 R21.2 R29.1 R36.2 R39.2 R41.2 R43.2 R45.2 R47.2 R57.1 R58.1 R70.1 R89.1 R93.1 R94.1 R97.1 R101.1 R102.1 U1.4 U2.1 U3.12 U3.18 U3.31 U3.47 U3.63 U4.8 U4.23 U4.35 U4.47 U5.10 U6.10 U7.15 U9.2 U9.4 U11.4 U14.2 U14.4 U14.9 U14.11 U15.4 U17.4 U19.7 U20.9 U20.11 U20.13 U20.15 U21.4 U22.4 U23.6 U23.8 U23.13 U23.15 U24.4 U29.2 U29.4 U29.6 U29.8 U33.4 U34.4
GREEN_LIGHT_IN: R25.2 U3.20
GREEN_LIGHT_OUT: C37.1 U13.5 U13.6 U13.7 U13.8
K1: R45.1 U18.13 U19.4
KIN1: CH9.1
LED_TEST: R3.1 U3.15
M1: C52.2 CH10.1 D3.1 D4.2 Q1.2 Q2.2
NetC12_2: C12.2 R5.1 U3.5 Y1.1
NetC13_2: C13.2 R5.2 U3.6 Y1.2
NetC18_2: C18.2 R10.1 U4.5 Y2.1
NetC19_2: C19.2 R10.2 U4.6 Y2.2
NetC26_1: C26.1 U7.1
NetC26_2: C26.2 U7.3
NetC27_2: C27.2 U7.2
NetC28_1: C28.1 U7.5
NetC28_2: C28.2 U7.4
NetC29_2: C29.2 U7.6
NetD1_2: D1.2 R3.2
NetLED1_1: LED1.1 R2.1
NetLED2_1: LED2.1 R1.1
NetLED3_1: LED3.1 R8.1
NetLED3_2: LED3.2 U4.11
NetQ1_1: Q1.1 R49.2 U18.12
NetQ2_1: Q2.1 R50.2 U18.10
NetR4_1: R4.1 U3.60
NetR6_2: R6.2 U3.7
NetR7_2: R7.2 U3.28
NetR9_1: R9.1 U4.20
NetR11_2: R11.2 U4.44
NetR12_2: R12.2 U4.7
NetR13_1: R13.1 U8.4
NetR14_2: R14.2
NetR15_2: R15.2 U9.14 U10.4
NetR16_1: R16.1 U9.3
NetR17_2: R17.2 U9.5
NetR20_2: R20.2 R21.1 U11.3 U11.5
NetR22_1: R22.1 U12.4
NetR23_1: R23.1 U13.4 U14.14
NetR24_2: R24.2
NetR25_1: R25.1 U14.3
NetR26_2: R26.2 U14.5
NetR29_2: R29.2 R30.2 U15.2 U15.6
NetR32_2: R32.2 U14.7
NetR34_2: R34.2 U16.1
NetR38_2: R38.2 R39.1 U17.3 U17.5
NetR40_2: R40.2 U16.3
NetR42_2: R42.2 U18.1
NetR44_2: R44.2 U18.3
NetR48_2: R48.2 U18.5 U18.7
NetR51_2: R51.2 U20.1
NetR53_2: R53.2 U20.3
NetR57_2: R57.2 R59.2 U21.2 U21.6
NetR58_2: R58.2 R61.2 U22.2 U22.6
NetR63_2: R63.2 U20.5
NetR65_2: R65.2 U20.7
NetR67_2: R67.2 U23.1
NetR70_2: R70.2 R71.2 U24.2 U24.6
NetR73_2: R73.2 U23.3
NetR75_2: R75.2 U23.12 U25.4
NetR76_2: R76.2 U23.10 U26.4
NetR77_2: R77.2 U23.5
NetR78_2: R78.2 U23.7
NetR79_2: R79.2 U27.4 U29.16
NetR80_2: R80.2 U28.4 U29.14
NetR81_2: R81.2 U29.1
NetR82_2: R82.2 U29.3
NetR83_2: R83.2 U29.12 U30.4
NetR84_2: R84.2 U29.10 U31.4
NetR85_2: R85.2 U29.5
NetR86_2: R86.2 U29.7
NetR87_2: R87.2 U32.6
NetR91_1: R91.1 R93.2 U33.3 U33.5
NetR92_2: R92.2 U32.8
NetR95_2: R95.2 U32.5
NetR99_1: R99.1 R101.2 U34.3 U34.5
NetR100_2: R100.2 U32.7
NetU5_7: U5.7 U5.13
NetU5_12: U5.12 U5.16
NetU6_7: U6.7 U6.13
NetU6_12: U6.12 U6.16
NetU18_8: U18.8 U19.6
PRINTER_COLOR_END: C60.2 R64.2 U20.12 U21.5
PRINTER_COLOR_END_IN: P1.4
PRINTER_COLOR_END_OUT: C53.1 R60.2 U3.33 U21.7
PRINTER_COLOR_LESS: C66.2 R68.2 U23.16 U24.3
PRINTER_COLOR_LESS_IN: P1.5
PRINTER_COLOR_LESS_OUT: C63.1 R69.2 U3.29 U24.1
PRINTER_END: C62.2 R66.2 U20.10 U22.5
PRINTER_END_IN: P1.2
PRINTER_END_OUT: C54.1 R62.2 U3.35 U22.7
PRINTER_ERR: C61.2 R54.2 U20.14 U22.3
PRINTER_ERR_IN: P1.1
PRINTER_ERR_OUT: C56.1 R56.2 U3.34 U22.1
PRINTER_INLINE: C59.2 R52.2 U20.16 U21.3
PRINTER_INLINE_IN: P1.3
PRINTER_INLINE_OUT: C55.1 R55.2 U3.30 U21.1
PRINTER_RESTART_IN: R78.1 U3.24
PRINTER_RESTART_OUT: C69.2 CH11.2 U26.5 U26.6 U26.7 U26.8
PRINTER_START_IN: R77.1 U3.25
PRINTER_START_OUT: C68.2 CH11.1 U25.5 U25.6 U25.7 U25.8
PRINTER_TAG_END: C67.2 R74.2 U23.14 U24.5
PRINTER_TAG_END_IN: P1.6
PRINTER_TAG_END_OUT: C64.1 R72.2 U3.36 U24.7
RED_LIGHT_IN: R24.1 U3.17
RED_LIGHT_OUT: C36.1 CH5.1 U12.5 U12.6 U12.7 U12.8
S11: R43.1 U18.15 U19.3
SCANNER: C48.2 R41.1 U16.13 U17.6
SCANNER_IN: C49.2 CH7.3 R40.1
SCANNER_OUT: C44.1 R37.2 U3.26 U4.18 U17.7
SCANNER_RXD: CH2.2 U7.14
SCANNER_TXD: CH2.3 U7.13
SIN11: C50.2 CH8.3 R42.1
SPEED11_IN: R14.1 U3.59
SPEED11_OUT: C31.1 CH3.3 U8.5 U8.6 U8.7 U8.8
START_KEY: C41.2 R27.2 U14.12 U15.3
START_KEY_IN: CH4.3 U14.6
START_KEY_OUT: C38.2 R28.2 U3.22 U15.1
STOP_KEY: C42.2 R33.2 U14.10 U15.5
STOP_KEY_IN: CH5.3 U14.8
STOP_KEY_OUT: C39.2 R31.2 U3.21 U15.7
TCK/SWCLK1: JP1.3 U3.49
TMS/SWDIO1: JP1.2 U3.46
UPPER_REACH: C77.1 R89.2 U32.15 U33.2
UPPER_REACH_IN: C78.2 CH14.3 R87.1
UPPER_REACH_OUT: C74.1 R88.1 U3.37 U33.1
VACUUM_IN: R86.1 U3.54
VACUUM_OUT: C73.2 CH12.4 U31.5 U31.6 U31.7 U31.8
pads on no net: CH2.5 CH2.6 CH4.1 CH12.1 CH13.1 JP2.2 JP2.3 Pad1.1 Pad2.1 Pad3.1 Pad4.1 U1.8 U3.1 U3.2 U3.3 U3.4 U3.8 U3.9 U3.10 U3.14 U3.16 U3.38 U3.39 U3.44 U3.45 U3.50 U3.51 U3.55 U3.56 U3.57 U3.58 U3.62 U4.1 U4.2 U4.3 U4.4 U4.10 U4.14 U4.15 U4.16 U4.17 U4.19 U4.25 U4.26 U4.27 U4.28 U4.32 U4.33 U4.34 U4.37 U4.38 U4.39 U4.40 U4.41 U4.43 U4.45 U4.46 U5.1 U5.2 U5.3 U5.4 U5.5 U5.6 U5.17 U6.1 U6.2 U6.3 U6.4 U6.5 U6.6 U6.17 U7.7 U7.8 U7.9 U7.10 U9.1 U9.7 U9.8 U9.9 U9.10 U9.16 U11.6 U11.7 U14.1 U14.16 U16.5 U16.6 U16.7 U16.8 U16.9 U16.10 U16.11 U16.12 U18.4 U18.6 U19.1 U19.2 U19.8 U19.9 U19.10 U19.11 U19.12 U19.13 U20.2 U20.4 U20.6 U20.8 U23.2 U23.4 U32.1 U32.3 U32.9 U32.11
copper on no net:
  other v1: 9345,4160 9845,4160 10175,4160 10675,4160

## Text inside footprints (layer, text, board x,y; h text height)
C5: Top Overlay "+" at 8095,6707.01 h59.06 r90
C7: Top Overlay "+" at 7695,6707.01 h59.06 r90
C8: Top Overlay "+" at 13290,4992.01 h59.06 r90
C14: Top Overlay "+" at 9670,4992.01 h59.06 r90
C22: Top Overlay "+" at 10940,4297.01 h59.06 r90
C23: Top Overlay "+" at 10997.01,4515 h59.06
C25: Top Overlay "+" at 8647.01,4515 h59.06
Q1: Top Overlay "S" at 8710,8285.47 h31.5; Top Overlay "D" at 8620,8285.47 h31.5; Top Overlay "G" at 8530,8285.47 h31.5
Q2: Top Overlay "S" at 7295,8285.47 h31.5; Top Overlay "D" at 7205,8285.47 h31.5; Top Overlay "G" at 7115,8285.47 h31.5